# Altium PCB 175-00002 rev 3, PCB, Sinistro Clock Gen.PcbDoc (part 5 of 6)
Units mil, origin at the board's own origin, x right, y up, seen from the top; angles counter-clockwise.
Board outline 5905.51 x 4330.71 mil, 10 copper layers (Top Layer (.GTL), MidLayer1 (*.G1), +12V (*.GP1), -12V (*.GP2), A & GND (*.GP3), Chassis E (*.GP4), +28V & VCC (*.GP5), MidLayer2 (*.G2), MidLayer3 (*.G3), Bottom Layer (.GBL)), stack 64.6 mil thick; 502 components, 332 nets, 1948 pads, 915 vias.
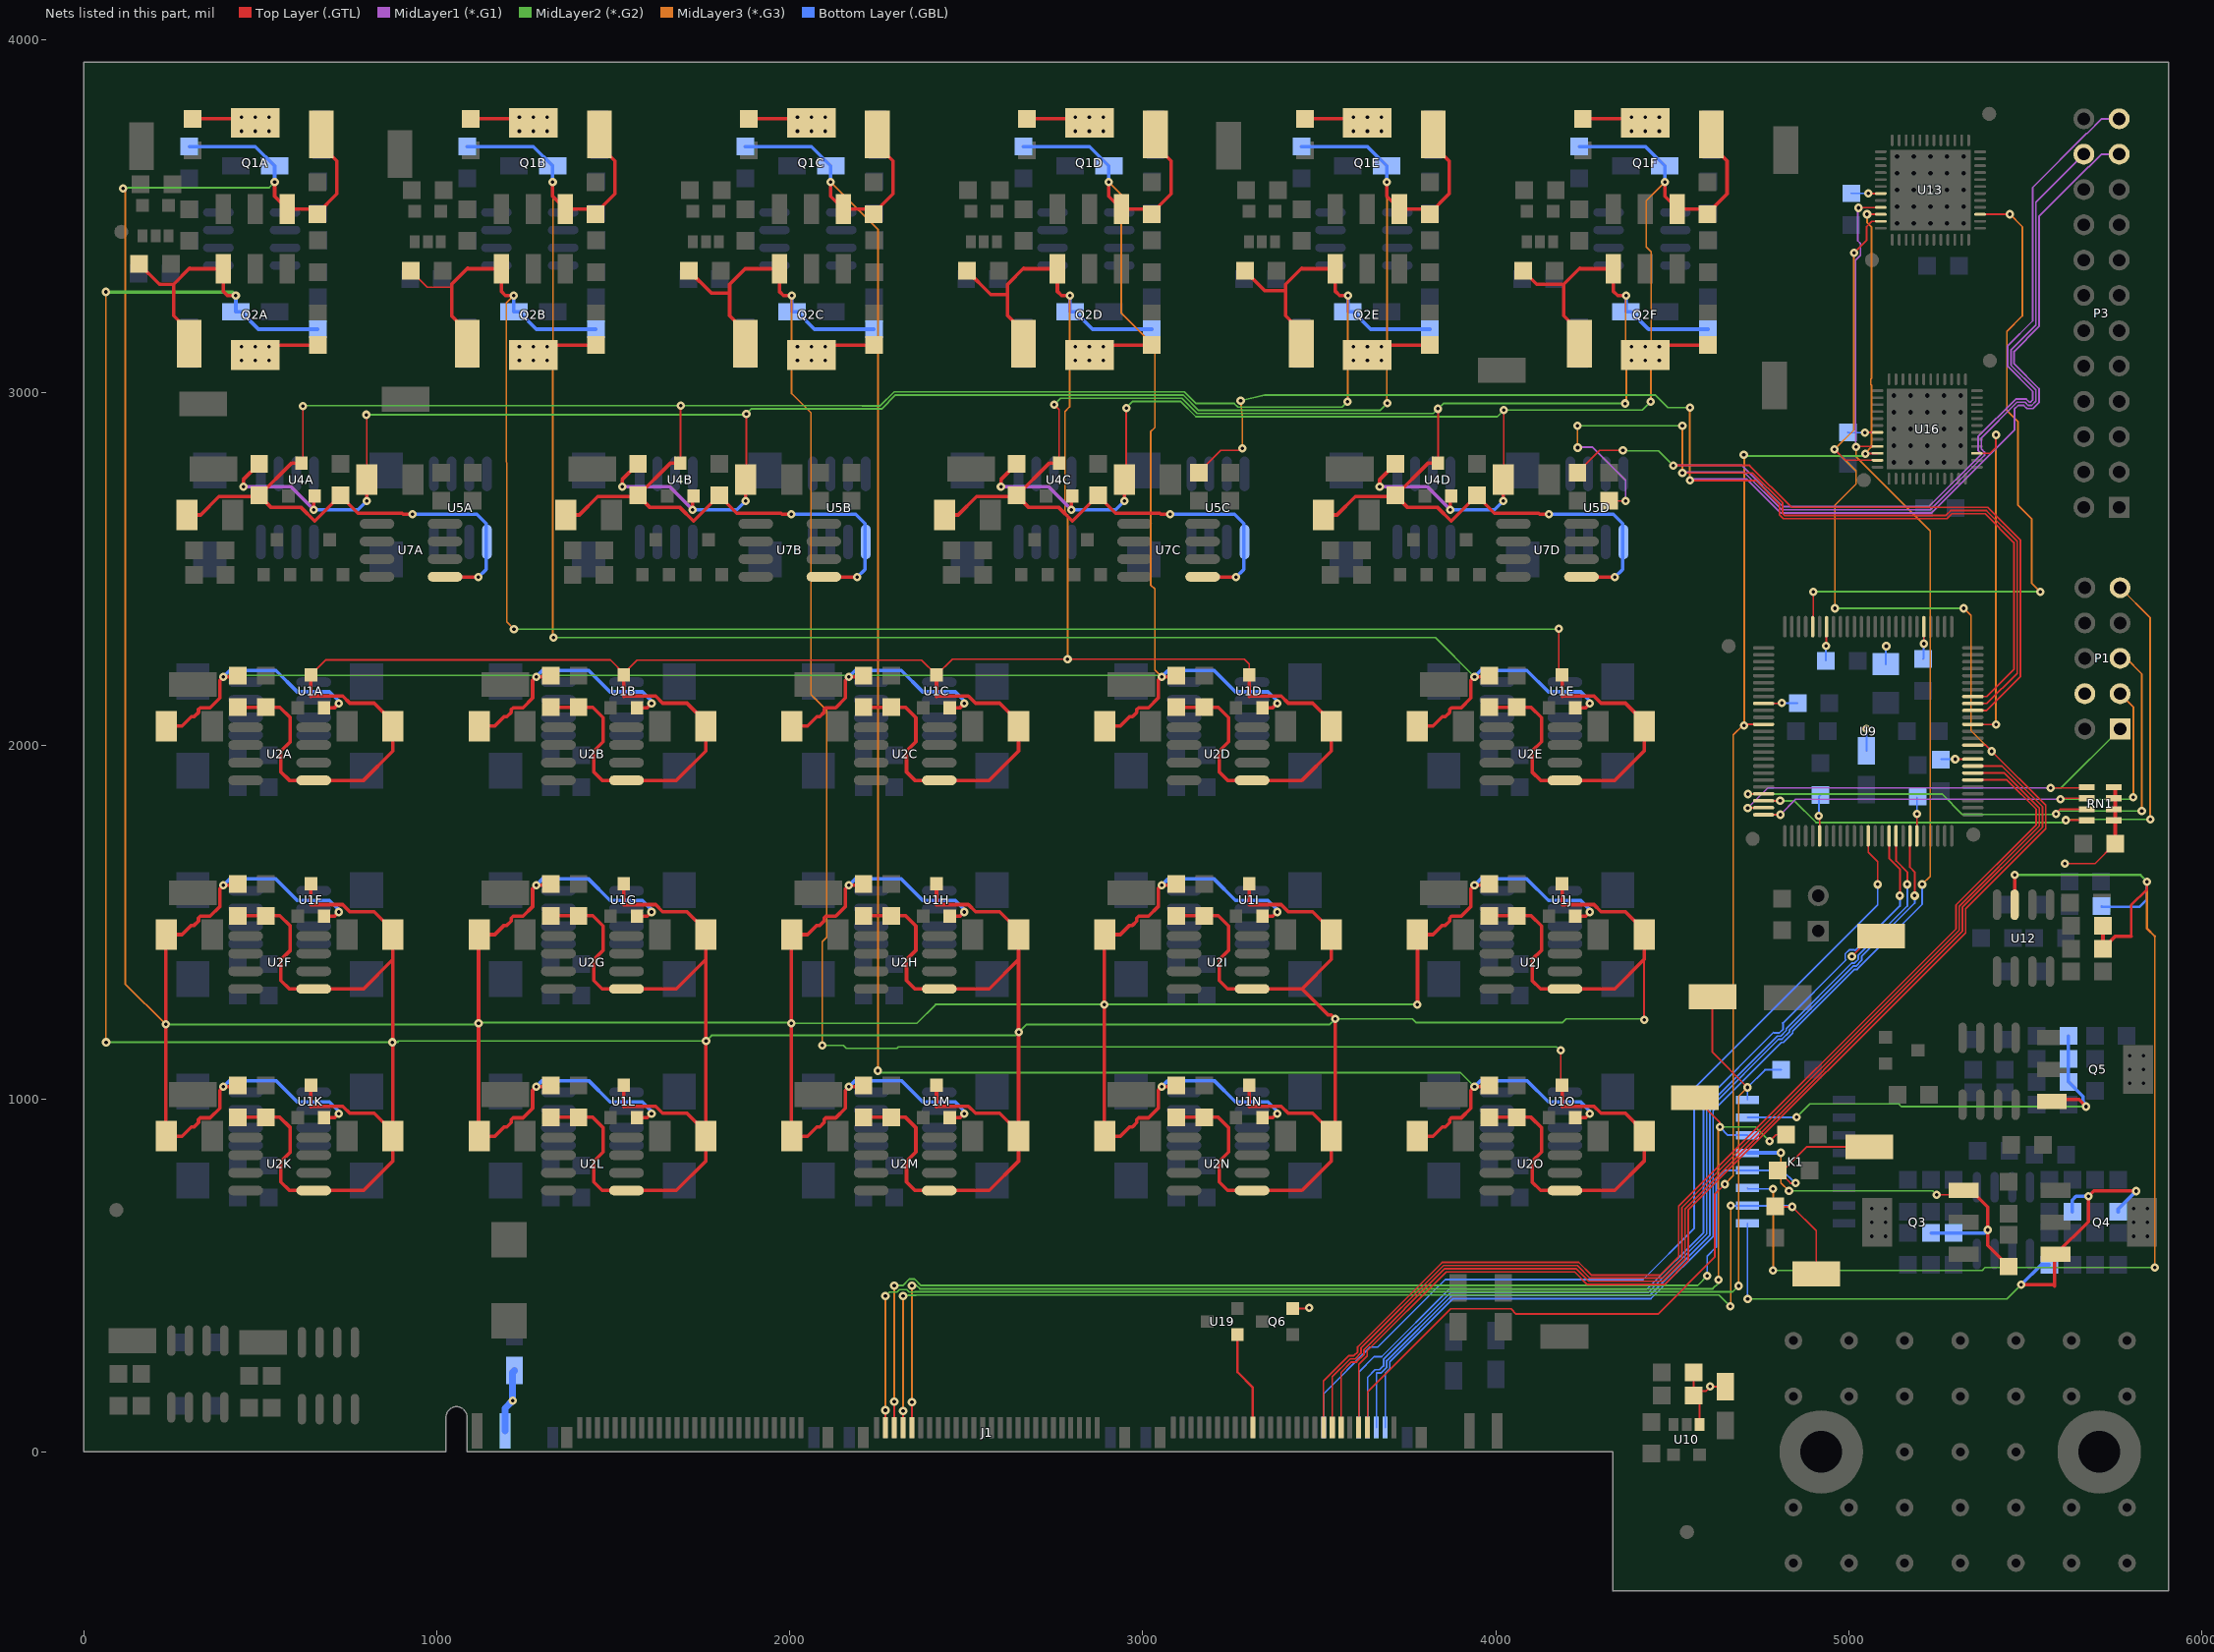
[diagram p13: the nets of this part, all layers, seen from the top]

## Via types
v1: diameter 24, hole 10, Top Layer (.GTL) to Bottom Layer (.GBL), 915 vias

## Nets (pads, with @x,y where several pads share a name; then routed paths per layer and width w, separated by ;. In a path a pad name is that pad's centre, name@x,y a point inside that pad or via, vN(x,y) a via of type N, cw(c..) or ccw(c..) an arc to the next point about the centre after c; other vN are vias at no path point) (continued)
PH_CLK21: P3.21 R3C.1 U9.68 | length 5397.5
  Top Layer (.GTL) w5: R3C.1@3158.07,2773.31 3220.76,2836 3276,2836 v1(3282,2842) ; v1(4549,2751) 4735.37,2751 4803,2683.37 4803,2653.54 4813.54,2643 5277.85,2643 5291.61,2656.76 5385.33,2656.76 5467,2575.1 5467,2216.06 5390,2139.06 U9.68@5350.67,2139.06
  MidLayer1 (*.G1) w5: v1(4549,2751) 4553.5,2755.5 4709.04,2755.5 4805.54,2659 5233.62,2659 5468.5,2893.88 5468.5,2952.66 5479.34,2963.5 5494.66,2963.5 5503.66,2954.5 5521.23,2954.5 5538,2971.27 5538,3010.84 5467.5,3081.34 5467.5,3116.5 5538,3187 5538,3498.95 5678.02,3638.97 5679.92,3638.97 5715.95,3675 P3.21@5765,3675
  MidLayer2 (*.G2) w5: v1(3277,2977) 3344.49,2992.49 4452,2992.49 4487,2957.49 v1(4549,2957.49)
  MidLayer3 (*.G3) w5: v1(3277,2977) 3282,2930 v1(3282,2842) ; v1(4549,2751) v1(4549,2957.49)
PH_CLK22: P3.22 R6D.1 U9.67 | length 4411.6
  Top Layer (.GTL) w5: R6D.1@4320.91,2693.31 4321.21,2693 v1(4367.5,2693) ; v1(4528,2772.5) 4726.6,2772.5 4812,2687.1 4812,2657.27 4817.27,2652 5274.12,2652 5287.88,2665.76 5389.06,2665.76 5476,2578.82 5476,2205 5390.37,2119.37 U9.67@5350.67,2119.37
  Top Layer (.GTL) w10: v1@4230.5,2845 v1@4230.91,2844.6 ; v1@4230.91,2843.24 v1(4231.67,2844)
  MidLayer1 (*.G1) w5: v1@4230.5,2845 4273.5,2845 4367.5,2751 v1(4367.5,2693) ; v1(4528,2772.5) 4529.91,2774.41 4702.86,2774.41 4809.27,2668 5229.89,2668 5383.5,2821.61 5383.5,2831.34 5374.5,2840.34 5374.5,2871.39 5475.61,2972.5 5498.39,2972.5 5507.39,2963.5 5517.23,2963.5 5528.73,2975 5529,2975 5529,3007.11 5458.5,3077.61 5458.5,3120.23 5529,3190.73 5529,3539 P3.22@5665,3675
  MidLayer2 (*.G2) w5: v1(4231,2906) v1(4528,2906)
  MidLayer3 (*.G3) w5: v1@4231,2836 v1(4231,2906) ; v1(4528,2772.5) v1(4528,2906)
PH_CLK23: P3.23 R3D.1 U9.66 | length 4175.1
  Top Layer (.GTL) w5: R3D.1@4230.91,2773.31 4293.6,2836 v1(4359.67,2836) ; v1(4502,2793.5) 4718.32,2793.5 4837.06,2674.76 5392.79,2674.76 5485,2582.55 5485,2195 5389.68,2099.69 U9.66@5350.67,2099.69
  MidLayer1 (*.G1) w5: v1(4502,2793.5) 4696.5,2793.5 4813,2677 5226.16,2677 5374.5,2825.34 5374.5,2827.61 5365.5,2836.61 5365.5,2875.12 5471.88,2981.5 5502.12,2981.5 5511.12,2972.5 5513.5,2972.5 5520,2979 5520,3003.38 5449.5,3073.88 5449.5,3132.5 5520,3203 5520,3580.95 5672.55,3733.5 5674.45,3733.5 5715.95,3775 P3.23@5765,3775
  MidLayer2 (*.G2) w5: v1@4357,2835 4460.5,2835 v1(4502,2793.5)
Q1_CA: Q1A.4 R12A.1 | length 165.6
  Top Layer (.GTL) w10: R12A.1@309.13,3775.32 Q1A.4@474.76,3775.32
Q1_CB: Q1B.4 R12B.1 | length 165.6
  Top Layer (.GTL) w10: R12B.1@1096.54,3775.32 Q1B.4@1262.17,3775.32
Q1_CC: Q1C.4 R12C.1 | length 165.6
  Top Layer (.GTL) w10: R12C.1@1883.94,3775.32 Q1C.4@2049.57,3775.32
Q1_CD: Q1D.4 R12D.1 | length 165.6
  Top Layer (.GTL) w10: R12D.1@2671.34,3775.32 Q1D.4@2836.97,3775.32
Q1_CE: Q1E.4 R12E.1 | length 165.6
  Top Layer (.GTL) w10: R12E.1@3458.74,3775.32 Q1E.4@3624.37,3775.32
Q1_CF: Q1F.4 R12F.1 | length 165.6
  Top Layer (.GTL) w10: R12F.1@4246.14,3775.32 Q1F.4@4411.77,3775.32
Q2_CA: Q2A.4 R20A.2 | length 149.3
  Top Layer (.GTL) w10: Q2A.4@514.13,3134.13 R20A.2@663.46,3134.13
Q2_CB: Q2B.4 R20B.2 | length 149.3
  Top Layer (.GTL) w10: Q2B.4@1301.53,3134.13 R20B.2@1450.87,3134.13
Q2_CC: Q2C.4 R20C.2 | length 149.3
  Top Layer (.GTL) w10: Q2C.4@2088.94,3134.13 R20C.2@2238.27,3134.13
Q2_CD: Q2D.4 R20D.2 | length 149.3
  Top Layer (.GTL) w10: Q2D.4@2876.34,3134.13 R20D.2@3025.67,3134.13
Q2_CE: Q2E.4 R20E.2 | length 149.3
  Top Layer (.GTL) w10: Q2E.4@3663.74,3134.13 R20E.2@3813.07,3134.13
Q2_CF: Q2F.4 R20F.2 | length 149.3
  Top Layer (.GTL) w10: Q2F.4@4451.14,3134.13 R20F.2@4600.47,3134.13
RESET_N: J1.6 U9.44 | length 2660.9
  Top Layer (.GTL) w5: U9.44@5170.41,1742.26 U9.44@5172.52,1744.37 5172.52,1655.48 5186,1642 v1(5186,1575)
  Bottom Layer (.GBL) w5: J1.6@3661.5,69.15 3661.5,223.34 3661.66,223.5 3674.39,223.5 3690.5,239.61 3690.5,258.23 3875.27,443 4435.27,443 4606,613.73 4606,974 4800.5,1168.5 4810.12,1168.5 4831.5,1189.88 4831.5,1195.23 5011.77,1375.5 5019.39,1375.5 5035.5,1391.61 5035.5,1403.5 5186,1554 v1(5186,1575)
RG: J1.17 U9.56 | length 3221.4
  Top Layer (.GTL) w5: J1.17@3511.5,69.15 3511.5,200.46 3583.54,272.5 3597.66,272.5 3608.5,283.34 3608.5,297.46 3847.91,536.87 4234.31,536.87 4270.18,501 4314,501 4465.8,501 4517.5,552.7 4517.5,695.68 5303,1481.18 5303,1549.18 5530,1776.18 5530,1819.82 5446.98,1902.84 U9.56@5350.67,1902.84
S1: J1.8 U9.42 | length 2667.1
  Top Layer (.GTL) w5: U9.42@5133.15,1744.37 5133.15,1673.85 5165,1642 v1(5165,1607)
  Bottom Layer (.GBL) w5: J1.8@3636.5,69.15 3636.5,211.07 3657.93,232.5 3670.66,232.5 3681.5,243.34 3681.5,261.96 3871.54,452 4431.54,452 4597,617.46 4597,977.73 4796.77,1177.5 4806.39,1177.5 4822.5,1193.61 4822.5,1198.96 5008.04,1384.5 5015.66,1384.5 5026.5,1395.34 5026.5,1407.23 5165,1545.73 v1(5165,1607)
S2: J1.10 U9.41 | length 2690.4
  Top Layer (.GTL) w5: U9.41@5113.46,1744.37 5113.46,1680.81 5144,1650.27 v1(5144,1575)
  Bottom Layer (.GBL) w5: J1.10@3611.5,69.15 3611.5,225.67 3655.34,269.5 3676.32,269.5 3867.82,461 4427.82,461 4588,621.18 4588,990 4785.92,1187.92 4787.34,1186.5 4802.66,1186.5 4813.5,1197.34 4813.5,1212.66 4812.08,1214.08 4991.42,1393.42 4989.5,1395.34 4989.5,1410.66 5000.34,1421.5 5015.66,1421.5 5017.58,1419.58 5144,1546 v1(5144,1575)
S3: J1.13 U9.58 | length 3246.8
  Top Layer (.GTL) w5: J1.13@3561.5,69.15 3561.5,225.01 3591,254.5 3605.12,254.5 3626.5,275.88 3626.5,290 3855.37,518.87 4226.86,518.87 4262.73,483 4314,483 4473.26,483 4535.5,545.24 4535.5,688.23 5321,1473.73 5321,1541.73 5548,1768.73 5548,1827.27 5433.07,1942.21 U9.58@5350.67,1942.21
S_WIRED_1: J1.33 U19.1 | length 280.9
  Top Layer (.GTL) w7: U19.1@3268,332 3268,226 3311.5,182.5 J1.33@3311.5,69.15
SCLK: J1.7 U9.12 U13.10 U16.10 | length 4734.8
  Top Layer (.GTL) w5: J1.7@3636.5,69.15 3636.5,170.07 3871.44,405 4042.56,405 4057.22,390.34 4458.61,390.34 4619.5,551.23 4619.5,729.5 v1(4648,758) ; v1(4703,2057) 4706.31,2060.32 U9.12@4758.15,2060.32 ; v1(5046,2827) 5079.89,2827 U16.10@5080.74,2827.85 ; v1(5051,3505) 5051.41,3504.59 U13.10@5089.74,3504.59
  MidLayer2 (*.G2) w5: v1(4702,2824) 4705.5,2820.5 5039.5,2820.5 v1(5046,2827)
  MidLayer3 (*.G3) w5: v1(4648,758) 4672,782 4672,801 4672,2030 4699,2057 v1(4703,2057) 4703,2823 v1(4702,2824) ; v1(5046,2827) 5046,2828 5063.5,2845.5 5063.5,3020.34 5061.5,3022.34 5061.5,3037.66 5063.5,3039.66 5063.5,3469.5 5051,3482 v1(5051,3505)
SEL_MAX1_N: U9.96 U13.27 | length 1968.4
  Top Layer (.GTL) w5: U9.96@4896.93,2336.89 4899,2338.96 v1(4899,2436) ; U13.27@5371.24,3504.59 5454.59,3504.59 v1(5455,3505)
  MidLayer2 (*.G2) w5: v1(4899,2436) v1(5542,2436)
  MidLayer3 (*.G3) w5: v1(5455,3505) 5490.96,3469.04 5490.96,3216.96 5447,3173 5447,2949 5478,2918 5478,2681.27 5517,2642.27 5517,2461 v1(5542,2436)
SEL_MAX2_N: U9.64 U16.27 | length 981.4
  Top Layer (.GTL) w5: U9.64@5350.67,2060.32 5350.98,2060 v1(5416,2060) ; U16.27@5362.24,2827.85 5399.01,2827.85 5416,2844.84 v1(5416,2880)
  MidLayer3 (*.G3) w5: v1(5416,2060) v1(5416,2880)
SG: J1.15 U9.57 | length 3234.1
  Top Layer (.GTL) w5: J1.15@3536.5,69.15 3536.5,212.73 3587.27,263.5 3601.39,263.5 3617.5,279.61 3617.5,293.73 3851.64,527.87 4230.59,527.87 4266.46,492 4314,492 4469.53,492 4526.5,548.97 4526.5,691.96 5312,1477.46 5312,1545.46 5539,1772.46 5539,1823.54 5440.02,1922.52 U9.57@5350.67,1922.52
SIMO: J1.9 U9.61 U13.11 U16.11 | length 5409.2
  Top Layer (.GTL) w5: J1.9@3611.5,69.15 3611.5,248.16 3635.5,272.15 3635.5,286.27 3859.09,509.87 4223.13,509.87 4259,474 4314,474 4476.99,474 4544.5,541.51 4544.5,684.5 5330,1470 5330,1538 5557,1765 5557,1831 v1(5404,1984) 5386.74,2001.26 U9.61@5350.67,2001.26 ; v1(4959,2839) 4989.83,2808.17 U16.11@5080.74,2808.17 ; v1(5014,3396) 5050,3432 5050,3470 5064.9,3484.91 U13.11@5089.74,3484.91
  MidLayer2 (*.G2) w5: v1(4960,2389) v1(5325,2389)
  MidLayer3 (*.G3) w5: v1(4960,2389) 4960,2681 5020,2741 5020,2778 v1(4959,2839) 5014,2894 v1(5014,3396) ; v1(5325,2389) 5345.5,2368.5 5345.5,2042.5 v1(5404,1984)
SOMI: J1.4 U13.9 U16.9 | length 4658.4
  Top Layer (.GTL) w5: v1@5020.54,2847.54 U16.9@5080.74,2847.54 ; v1(5027.16,3523) 5027.66,3523.5 5088.97,3523.5 U13.9@5089.74,3524.28
  MidLayer1 (*.G1) w5: v1@5018.5,2847.5 5018.5,3374.34 5032.5,3388.34 5032.5,3422 5024.73,3429.77 5024.73,3515.23 v1@5032.5,3523 ; v1(5027.16,3523) 5031.16,3527 5032,3527 v1@5032.5,3526.5
  MidLayer2 (*.G2) w5: v1@5026.16,3524 v1(5027.16,3523)
  MidLayer3 (*.G3) w5: v1(5020,2846) 5020,2818.48 5229.91,2608.57 5229.91,1629.91 v1(5207,1607)
  Bottom Layer (.GBL) w5: J1.4@3686.5,69.15 3686.5,222.89 3699.5,235.88 3699.5,254.5 3879,434 4439,434 4615,610 4615,966 4808.5,1159.5 4813.85,1159.5 4840.5,1186.15 4840.5,1191.5 5015.5,1366.5 5023.12,1366.5 5207,1550.38 v1(5207,1607)
TCK: P1.1 RN1.1 U9.24 | length 1292.4
  Top Layer (.GTL) w5: v1(4713,1823) 4714.09,1824.1 U9.24@4758.15,1824.1 ; v1(5571,1880) RN1.1@5670.23,1880
  MidLayer1 (*.G1) w5: v1(4713,1823) 4770,1880 v1(5571,1880)
  MidLayer2 (*.G2) w5: v1(5571,1880) 5600.47,1880 P1.1@5767.72,2047.24
TDI: P1.9 RN1.7 U9.23 | length 1874.1
  Top Layer (.GTL) w5: U9.23@4758.15,1843.78 v1(4804.78,1843.78) v1@4805,1844 ; v1(5614,1789) RN1.7@5672.16,1789
  MidLayer2 (*.G2) w5: v1(4804.78,1843.78) 4845.1,1843.78 4906.75,1782.13 5607.13,1782.13 v1(5614,1789) 5616,1791 v1(5853,1791)
  MidLayer3 (*.G3) w5: P1.9@5767.72,2447.24 5853,2361.96 v1(5853,1791)
TDO: P1.3 RN1.3 U9.25 | length 1451.9
  Top Layer (.GTL) w5: U9.25@4758.15,1804.41 v1(4805.59,1804.41) v1@4806,1804 ; v1(5599,1848) 5602.21,1851.21 RN1.3@5672.94,1851.21
  MidLayer1 (*.G1) w5: v1(4805.59,1804.41) 4849.18,1848 v1(5599,1848)
  MidLayer2 (*.G2) w5: v1(5599,1848) 5799,1848 v1(5805,1854)
  MidLayer3 (*.G3) w5: P1.3@5767.72,2147.24 5805,2109.96 v1(5805,1854)
TG: J1.18 U9.38 | length 2676.7
  Top Layer (.GTL) w5: U9.38@5054.41,1744.37 5054.41,1697.58 5081,1670.99 v1(5081,1607)
  Bottom Layer (.GBL) w5: J1.18@3511.5,69.15 3511.5,163.85 3644.15,296.5 3665.13,296.5 3856.63,488 4416.63,488 4561,632.37 4561,1028.73 5081,1548.73 v1(5081,1607)
TMS: P1.5 RN1.5 U9.22 | length 1749.3
  Top Layer (.GTL) w5: v1(4714,1863) 4714.46,1863.47 U9.22@4758.15,1863.47 ; v1@5585,1807 5597.72,1819.72 RN1.5@5672.94,1819.72
  MidLayer2 (*.G2) w5: v1(4714,1863) 5263,1863 5321,1805 5584,1805 v1(5586,1807) 5594,1815 v1(5829,1815)
  MidLayer3 (*.G3) w5: v1@5585,1807 v1(5586,1807) ; P1.5@5767.72,2247.24 5784.76,2247.24 5829,2203 v1(5829,1815)
VCC: C7.1 C12.2 C16.2 C17.2 C18.2 C19.2 C20.2 C21.2 C23.2 C24.2 C32.1 C34.2 C36.2 C55.1 J1.PC06 L5.2 P1.4 Q6.2 RN1.2 RN1.4 RN1.6 RN1.8 TP19.1 U9.9 U9.31 U9.45 U9.59 U9.80 U9.94 U10.1 U13.7 U16.7 | length 1823.3
  Top Layer (.GTL) w5: Q6.2@3424,406 3469,406 v1(3471,408) ; C12.2@4560,225 C16.2@4560,169 ; U10.1@4577,78 4577,143 C16.2@4560,160 C16.2@4560,169 ; C7.1@4650,185 v1(4607,185) 4594,172 4563,172 C16.2@4560,169 ; U9.9@4758.15,2119.37 4808.15,2119.37 v1(4809.41,2120.63) ; v1(4914.41,1800.63) 4916.61,1798.42 U9.31@4916.61,1744.37 ; v1(4935.41,2282.63) U9.94@4935.41,2336 ; v1(5008,1403) 5093,1488 TP19.1@5102,1488 ; v1(5045,2886.26) 5045.64,2886.91 U16.7@5080.74,2886.91 ; v1(5055,3564) 5055.35,3563.65 U13.7@5089.74,3563.65 ; U9.45@5192.2,1744.37 5192.2,1806.43 v1(5192.41,1806.63) ; v1(5211.41,2288.63) 5211.89,2289.11 U9.80@5211.89,2336.89 ; v1(5300.41,1961.63) 5300.67,1961.89 U9.59@5350.67,1961.89 ; v1(5611,1666) 5696.84,1666 5753.55,1722.71 C17.2@5754,1722.71
  Top Layer (.GTL) w10: RN1.2@5749.71,1882.71 5754,1878.42 C17.2@5754,1722.71
  Bottom Layer (.GBL) w5: v1(4809.41,2120.63) C19.2@4854.41,2120.63 ; v1(4914.41,1800.63) 4914.41,1855.63 C18.2@4919.41,1860.63 ; C23.2@4934.41,2240.63 4934.41,2281.63 v1(4935.41,2282.63) ; C36.2@4997,2887.26 4998,2886.26 v1(5045,2886.26) ; C34.2@5006,3564 v1(5055,3564) ; C32.1@5049.41,1985.63 v1(5049.41,2047.63) ; L5.2@5104.41,2230.63 5104.41,2280.63 v1(5105.41,2281.63) ; v1(5192.41,1806.63) C20.2@5192.41,1853.63 ; C21.2@5209.41,2245.63 5211.41,2247.63 v1(5211.41,2288.63) ; C24.2@5260.41,1961.63 v1(5300.41,1961.63)
  Bottom Layer (.GBL) w20: J1.PC06@1193.5,59.15 1193.5,123.5 v1(1215,145) 1215,225 C55.1@1220,230
VDD: J1.101 K1.16 R52.2 TP8.1 | length 3829
  Top Layer (.GTL) w5: v1(2271,118) 2271.16,117.84 J1.101@2271.16,68.09 ; TP8.1@4613,1289 4613,1131.38 v1(4712.19,1032.19)
  MidLayer2 (*.G2) w5: v1(2271,441) 2282.5,452.5 2303.66,452.5 2310.66,459.5 2331.34,459.5 2338.34,452.5 2353.66,452.5 2354.16,453 4670,453 v1(4687,470)
  MidLayer3 (*.G3) w5: v1(2271,118) v1(2271,441) ; v1(4687,470) 4687,1007 v1(4712.19,1032.19)
  Bottom Layer (.GBL) w5: K1.16@4712.19,997 v1(4712.19,1032.19) 4762.1,1082.1 R52.2@4808,1082.1
VDD_K1: C39.2 K1.15 Q5.3 R37.2 R43.2 | length 1337
  Top Layer (.GTL) w10: Q5.3@5546.46,997.84 5568.86,997.84 Q5.3@5574.41,992.28 5579.96,997.84 5651.46,997.84 v1(5671.46,977.84)
  MidLayer2 (*.G2) w5: v1(4851,948) 4888.5,985.5 5140.66,985.5 5148.33,977.84 v1(5671.46,977.84)
  Bottom Layer (.GBL) w5: K1.15@4712.19,947 4850,947 v1(4851,948)
  Bottom Layer (.GBL) w10: R43.2@5621.46,1177.84 R37.2@5621.46,1047.84 5662.46,1006.84 5662.46,991.84 5671.46,982.84 v1(5671.46,977.84)
VOD: J1.95 K1.14 R49.2 TP5.1 | length 3553.1
  Top Layer (.GTL) w5: v1(2346,141) 2346.16,140.84 J1.95@2346.16,68.09 ; TP5.1@4564,1003 4634,933 v1(4634,920) ; v1(4775,880) 4793,898 R49.2@4822,898
  MidLayer2 (*.G2) w5: v1(2346,471) 2359.43,471 2368.43,462 4614,462 4630,478 v1(4630,487) ; v1(4634,920) 4735,920 v1(4775,880)
  MidLayer3 (*.G3) w5: v1(2346,141) v1(2346,471) ; v1(4630,487) 4630,745.34 4629.5,745.84 4629.5,915.5 v1(4634,920)
  Bottom Layer (.GBL) w5: v1(4634,920) 4657,897 K1.14@4712.19,897
VOD_K1: C29.2 K1.13 Q3.3 R15.2 R31.2 | length 1164.5
  Top Layer (.GTL) w5: v1(5248,728) 5311.79,728 Q3.3@5324.26,740.47
  Top Layer (.GTL) w10: Q3.3@5322.21,742.52 Q3.3@5324.26,740.47 5345.79,740.47 5392.72,693.54 v1(5392.72,628.54) 5392.72,584.42 R31.2@5452.22,524.92
  MidLayer2 (*.G2) w5: v1(4830,739) 5237,739 v1(5248,728)
  MidLayer3 (*.G3) w5: v1(4807,847) 4807,762 v1(4830,739)
  Bottom Layer (.GBL) w10: K1.13@4712.19,847 v1(4807,847) ; C29.2@5232.22,619.92 R15.2@5296.19,619.92 5384.09,619.92 v1(5392.72,628.54)
VOG: J1.99 K1.12 R51.2 TP7.1 | length 3620.8
  Top Layer (.GTL) w5: v1(2296,142) 2296.16,141.84 J1.99@2296.16,68.09 ; v1(4849,761) 4834,761 R51.2@4798,797 4814,797 4881,864 TP7.1@5058,864
  MidLayer2 (*.G2) w5: v1(2296,471) 2319.84,471 2338.34,489.5 2353.66,489.5 2372.16,471 4571,471 v1(4598,498)
  MidLayer3 (*.G3) w5: v1(2296,142) v1(2296,471)
  Bottom Layer (.GBL) w5: v1(4598,498) 4598,554.27 4624,580.27 4624,773 4648,797 K1.12@4712.19,797 4811,797 4847,761 v1(4849,761)
VOG_K1: C30.2 K1.11 R21.2 R36.2 U12.7 | length 3481.1
  Top Layer (.GTL) w5: 5799,1460 5800,1461
  Top Layer (.GTL) w7: 5799,1460 5799,1548 5844,1593 v1(5844,1615)
  Top Layer (.GTL) w10: U12.7@5469,1549.49 v1(5469,1634) ; C30.2@5719,1490 R21.2@5719,1425 5754,1460 5799,1460
  MidLayer2 (*.G2) w5: v1(4785,514) 5097,514 5377.01,514 5385.05,522.04 v1@5866,522.04
  MidLayer2 (*.G2) w7: v1(5469,1634) 5825,1634 v1(5844,1615)
  MidLayer3 (*.G3) w5: v1(4785,514) v1(4785,745) ; v1(5866,522) 5866,1460
  MidLayer3 (*.G3) w7: v1(5844,1615) 5844,1482 5866,1460
  Bottom Layer (.GBL) w5: K1.11@4712.19,747 4714.19,745 v1(4785,745)
  Bottom Layer (.GBL) w7: R36.2@5715,1545 5716,1544 5823,1544 5844,1565 v1(5844,1615)
VRD: J1.97 K1.10 R50.2 TP6.1 | length 3458.7
  Top Layer (.GTL) w5: v1(2321,116) 2321.16,115.84 J1.97@2321.16,68.09 ; R50.2@4791,696 4793,694 v1(4839,694) 4907,626 TP6.1@4907,504
  MidLayer2 (*.G2) w5: v1(2321,441) 2323.5,443.5 2357.39,443.5 2357.89,444 4632,444 v1(4664,412)
  MidLayer3 (*.G3) w5: v1(2321,116) v1(2321,441) ; v1(4664,412) 4665,412 v1(4665,697)
  Bottom Layer (.GBL) w5: v1(4665,697) K1.10@4712.19,697 4836,697 v1(4839,694)
VRD_K1: C28.2 K1.9 Q4.3 R18.2 R34.1 | length 1802.4
  Top Layer (.GTL) w10: v1(5487.72,473.54) 5578.59,473.54 5582.21,469.92 5582.21,556.42 Q4.3@5585.17,559.37 5677.72,651.92 v1(5677.72,723.54) 5693.72,739.54 5811.72,739.54 v1(5812.72,738.54)
  MidLayer2 (*.G2) w5: v1(4713,433) 5447.17,433 v1(5487.72,473.54)
  Bottom Layer (.GBL) w5: K1.9@4712.19,647 4712.19,433.81 v1(4713,433)
  Bottom Layer (.GBL) w10: v1(5487.72,473.54) 5544.09,529.92 R34.1@5567.22,529.92 ; R18.2@5632.21,679.92 5632.21,713.04 5642.72,723.54 v1(5677.72,723.54) ; C28.2@5762.21,679.92 5762.21,688.04 v1(5812.72,738.54)
VREFHI1: C4F.2 C4G.2 C4H.2 C4I.2 C4J.2 C4K.2 C4L.2 C4M.2 C4N.2 C13A.1 L1F.1 L1G.1 L1H.1 L1I.1 L1J.1 L1K.1 L1L.1 L1M.1 L1N.1 Q1A.3 R7A.2 R13A.2 TP1A.1 U1F.2 U1G.2 U1H.2 U1I.2 U1J.2 U1K.2 U1L.2 U1M.2 U1N.2 | length 16155.3
  Top Layer (.GTL) w10: L1F.1@232.87,1463.18 v1(232.87,1210.49) 232.87,895.63 L1K.1@234.53,893.98 278.8,893.98 305.12,920.3 313.19,920.3 325.53,932.63 325.53,940.7 330.8,945.98 358.49,945.98 385.87,973.36 385.87,1023.66 v1(396.04,1033.82) ; L1F.1@232.87,1466.5 234.53,1464.84 278.8,1464.84 305.12,1491.16 313.19,1491.16 325.53,1503.5 325.53,1511.57 330.8,1516.84 358.49,1516.84 385.87,1544.22 385.87,1594.52 v1@395.98,1604.64 ; v1(396.04,1033.82) v1(396.04,1033.82) ; v1(396.04,1604.69) v1@395.98,1604.64 ; C4K.2@437.32,1037.4 433.69,1033.77 v1(396.04,1033.82) ; C4F.2@437.32,1608.27 433.69,1604.64 v1@395.98,1604.64 ; v1(541.3,3595.59) 541.3,3555.24 Q1A.3@576.85,3519.68 651.93,3519.69 663.46,3508.15 717.6,3562.28 717.6,3655.51 673.31,3699.8 TP1A.1@673.31,3730.32 ; U1K.2@681.42,946.14 710.94,946.14 v1(722.76,957.95) ; U1F.2@681.42,1517.01 710.94,1517.01 v1(722.76,1528.82) ; L1G.1@1118.7,1463.18 v1(1118.7,1214) 1118.7,895.63 L1L.1@1120.35,893.98 1164.63,893.98 1190.95,920.3 1199.02,920.3 1211.35,932.63 1211.35,940.7 1216.63,945.98 1244.31,945.98 1271.7,973.36 1271.7,1023.66 v1(1281.86,1033.82) ; L1G.1@1118.7,1466.5 1120.35,1464.84 1164.63,1464.84 1190.95,1491.16 1199.02,1491.16 1211.35,1503.5 1211.35,1511.57 1216.63,1516.84 1244.31,1516.84 1271.7,1544.22 1271.7,1594.52 v1@1281.81,1604.64 ; v1(1281.86,1033.82) v1(1281.86,1033.82) ; v1(1281.86,1604.69) v1@1281.81,1604.64 ; C4L.2@1323.15,1037.4 1319.52,1033.77 v1(1281.86,1033.82) ; C4G.2@1323.15,1608.27 1319.52,1604.64 v1@1281.81,1604.64 ; U1L.2@1567.24,946.14 1596.77,946.14 v1(1608.58,957.95) ; U1G.2@1567.24,1517.01 1596.77,1517.01 v1(1608.58,1528.82) ; L1H.1@2004.52,1463.18 v1(2004.52,1214) 2004.52,895.63 L1M.1@2006.18,893.98 2050.45,893.98 2076.78,920.3 2084.85,920.3 2097.18,932.63 2097.18,940.7 2102.45,945.98 2130.14,945.98 2157.52,973.36 2157.52,1023.66 v1@2167.64,1033.77 ; L1H.1@2004.52,1466.5 2006.18,1464.84 2050.45,1464.84 2076.78,1491.16 2084.85,1491.16 2097.18,1503.5 2097.18,1511.57 2102.45,1516.84 2130.14,1516.84 2157.52,1544.22 2157.52,1594.52 v1@2167.64,1604.64 ; v1(2167.69,1033.82) v1@2167.64,1033.77 ; v1(2167.69,1604.69) v1@2167.64,1604.64 ; C4M.2@2208.98,1037.4 2205.35,1033.77 v1@2167.64,1033.77 ; C4H.2@2208.98,1608.27 2205.35,1604.64 v1@2167.64,1604.64 ; U1M.2@2453.07,946.14 2482.6,946.14 v1(2494.41,957.95) ; U1H.2@2453.07,1517.01 2482.6,1517.01 v1(2494.41,1528.82) ; v1(3053.52,1033.82) v1@3053.46,1033.77 ; v1(3053.52,1604.69) v1@3053.46,1604.64 ; C4N.2@3094.8,1037.4 3091.17,1033.77 v1@3053.46,1033.77 ; C4I.2@3094.8,1608.27 3091.17,1604.64 v1@3053.46,1604.64 ; U1N.2@3338.9,946.14 3368.42,946.14 v1(3380.24,957.95) ; U1I.2@3338.9,1517.01 3368.42,1517.01 v1(3380.24,1528.82) ; L1J.1@3776.18,1466.5 L1J.1@3777.83,1464.84 ; v1(3777,1267) 3777.83,1267.84 L1J.1@3777.83,1464.84 ; v1(3939.34,1604.69) v1@3939.29,1604.64 ; C4J.2@3980.63,1608.27 3977,1604.64 v1@3939.29,1604.64 ; U1J.2@4224.72,1517.01 4254.25,1517.01 v1(4266.06,1528.82) ; v1@3053.46,1033.77 3043.35,1023.66 3043.35,973.36 3015.97,945.98 2988.28,945.98 2983.01,940.7 2983.01,932.63 2970.67,920.3 2962.6,920.3 2936.28,893.98 L1N.1@2892.01,893.98 2890.35,895.63 2890.35,1464.84 2890.35,1466.5 2892.01,1464.84 2936.28,1464.84 2962.6,1491.16 2970.67,1491.16 2983.01,1503.5 2983.01,1511.57 2988.28,1516.84 3015.97,1516.84 3043.35,1544.22 3043.35,1594.52 v1@3053.46,1604.64 ; L1J.1@3777.83,1464.84 3822.11,1464.84 3848.43,1491.16 3856.5,1491.16 3868.83,1503.5 3868.83,1511.57 3874.11,1516.84 3901.79,1516.84 3929.18,1544.22 3929.18,1594.52 v1@3939.29,1604.64
  MidLayer1 (*.G1) w10: v1(396.04,1033.82) v1@396.49,1033.36 ; v1(396.04,1604.69) v1@396.49,1604.23 ; v1(1281.86,1033.82) v1@1282.32,1033.36 ; v1(1281.86,1604.69) v1@1282.32,1604.23 ; v1(2167.69,1033.82) v1@2168.15,1033.36 ; v1(2167.69,1604.69) v1@2168.15,1604.23 ; v1(3053.52,1033.82) v1@3053.97,1033.36 ; v1(3053.52,1604.69) v1@3053.97,1604.23 ; v1(3939.34,1604.69) v1@3939.8,1604.23
  MidLayer2 (*.G2) w5: v1(112,3578) 113.93,3579.93 525.63,3579.93 v1(541.3,3595.59) ; v1(232.87,1210.49) 1115.19,1210.49 v1(1118.7,1214) 1118.7,1216 2002.52,1216 v1(2004.52,1214) 2360,1214 2413,1267 v1(2890.35,1267) v1(3777,1267)
  MidLayer3 (*.G3) w5: v1(112,3578) 118,3572 118,1325.36 v1(232.87,1210.49)
  Bottom Layer (.GBL) w10: R7A.2@299.29,3696.58 486.46,3696.58 C13A.1@541.3,3641.73 v1(541.3,3595.59) ; v1(396.04,1033.82) 413.7,1051.49 544.58,1051.49 605.09,990.97 696.76,990.97 722.76,964.97 v1(722.76,957.95) ; v1(396.04,1604.69) 413.7,1622.35 544.58,1622.35 605.09,1561.83 696.76,1561.83 722.76,1535.83 v1(722.76,1528.82) ; v1(1281.86,1033.82) 1299.53,1051.49 1430.4,1051.49 1490.92,990.97 1582.58,990.97 1608.58,964.97 v1(1608.58,957.95) ; v1(1281.86,1604.69) 1299.53,1622.35 1430.4,1622.35 1490.92,1561.83 1582.58,1561.83 1608.58,1535.83 v1(1608.58,1528.82) ; v1(2167.69,1033.82) 2185.35,1051.49 2316.23,1051.49 2376.75,990.97 2468.41,990.97 2494.41,964.97 v1(2494.41,957.95) ; v1(2167.69,1604.69) 2185.35,1622.35 2316.23,1622.35 2376.75,1561.83 2468.41,1561.83 2494.41,1535.83 v1(2494.41,1528.82) ; v1(3053.52,1033.82) 3071.18,1051.49 3202.06,1051.49 3262.57,990.97 3354.24,990.97 3380.24,964.97 v1(3380.24,957.95) ; v1(3053.52,1604.69) 3071.18,1622.35 3202.06,1622.35 3262.57,1561.83 3354.24,1561.83 3380.24,1535.83 v1(3380.24,1528.82) ; v1(3939.34,1604.69) 3957.01,1622.35 4087.88,1622.35 4148.4,1561.83 4240.06,1561.83 4266.06,1535.83 v1(4266.06,1528.82)
VREFHI2: C4E.2 C13B.1 L1E.1 Q1B.3 R7B.2 R13B.2 TP1B.1 U1E.2 | length 5423.6
  Top Layer (.GTL) w10: v1(1328.7,3595.59) 1328.7,3555.24 Q1B.3@1364.25,3519.68 1439.33,3519.69 1450.87,3508.15 1505,3562.28 1505,3655.51 1460.71,3699.8 TP1B.1@1460.71,3730.32 ; L1E.1@3776.18,2057.05 L1E.1@3777.83,2055.39 3822.11,2055.39 3848.43,2081.72 3856.5,2081.72 3868.83,2094.05 3868.83,2102.12 3874.11,2107.39 3901.79,2107.39 3929.18,2134.78 3929.18,2185.07 v1(3939.34,2195.24) ; v1(3939.34,2195.24) v1(3939.34,2195.24) ; C4E.2@3980.63,2198.82 3977,2195.19 v1(3939.34,2195.24) ; U1E.2@4224.72,2107.56 4254.25,2107.56 v1(4266.06,2119.37)
  MidLayer1 (*.G1) w10: v1(3939.34,2195.24) v1@3939.8,2194.78
  MidLayer2 (*.G2) w5: v1(1331,2306) 3828.58,2306 v1(3939.34,2195.24)
  MidLayer3 (*.G3) w5: v1(1328.7,3595.59) 1329.57,3594.72 1329.57,3083.72 1329,3083.15 1329,2308 v1(1331,2306)
  Bottom Layer (.GBL) w10: R7B.2@1086.69,3696.58 1273.86,3696.58 C13B.1@1328.7,3641.73 v1(1328.7,3595.59) ; v1(3939.34,2195.24) 3957.01,2212.9 4087.88,2212.9 4148.4,2152.39 4240.06,2152.39 4266.06,2126.39 v1(4266.06,2119.37)
VREFHI3: C4O.2 C13C.1 L1O.1 Q1C.3 R7C.2 R13C.2 TP1C.1 U1O.2 | length 5760.4
  Top Layer (.GTL) w10: v1(2116.1,3595.59) 2116.1,3555.24 Q1C.3@2151.65,3519.68 2226.73,3519.69 2238.27,3508.15 2292.4,3562.28 2292.4,3655.51 2248.11,3699.8 TP1C.1@2248.11,3730.32 ; L1O.1@3776.18,895.63 L1O.1@3777.83,893.98 3822.11,893.98 3848.43,920.3 3856.5,920.3 3868.83,932.63 3868.83,940.7 3874.11,945.98 3901.79,945.98 3929.18,973.36 3929.18,1023.66 v1(3939.34,1033.82) ; v1(3939.34,1033.82) v1(3939.34,1033.82) ; C4O.2@3980.63,1037.4 3977,1033.77 v1(3939.34,1033.82) ; U1O.2@4224.72,946.14 4254.25,946.14 v1(4266.06,957.95)
  MidLayer1 (*.G1) w10: v1(3939.34,1033.82) v1@3939.8,1033.36
  MidLayer2 (*.G2) w5: v1(2249.73,1079.49) 2249.73,1080.73 2250,1081 2257,1074 3899.17,1074 v1(3939.34,1033.82)
  MidLayer3 (*.G3) w5: v1(2116.1,3595.59) 2249.73,3461.96 v1(2249.73,1079.49)
  Bottom Layer (.GBL) w10: R7C.2@1874.09,3696.58 2061.26,3696.58 C13C.1@2116.1,3641.73 v1(2116.1,3595.59) ; v1(3939.34,1033.82) 3957.01,1051.49 4087.88,1051.49 4148.4,990.97 4240.06,990.97 4266.06,964.97 v1(4266.06,957.95)
VREFHI4: C4A.2 C4B.2 C4C.2 C4D.2 C13D.1 L1A.1 L1B.1 L1C.1 L1D.1 Q1D.3 R7D.2 R13D.2 TP1D.1 U1A.2 U1B.2 U1C.2 U1D.2 | length 7767.9
  Top Layer (.GTL) w10: L1A.1@232.87,2057.05 L1A.1@234.53,2055.39 278.8,2055.39 305.12,2081.72 313.19,2081.72 325.53,2094.05 325.53,2102.12 330.8,2107.39 358.49,2107.39 385.87,2134.78 385.87,2185.07 v1(396.04,2195.24) ; v1(396.04,2195.24) v1(396.04,2195.24) ; C4A.2@437.32,2198.82 433.69,2195.19 v1(396.04,2195.24) ; U1A.2@681.42,2107.56 710.94,2107.56 v1(722.76,2119.37) ; L1B.1@1118.7,2057.05 L1B.1@1120.35,2055.39 1164.63,2055.39 1190.95,2081.72 1199.02,2081.72 1211.35,2094.05 1211.35,2102.12 1216.63,2107.39 1244.31,2107.39 1271.7,2134.78 1271.7,2185.07 v1(1281.86,2195.24) ; v1(1281.86,2195.24) v1(1281.86,2195.24) ; C4B.2@1323.15,2198.82 1319.52,2195.19 v1(1281.86,2195.24) ; U1B.2@1567.24,2107.56 1596.77,2107.56 v1(1608.58,2119.37) ; L1C.1@2004.52,2057.05 L1C.1@2006.18,2055.39 2050.45,2055.39 2076.78,2081.72 2084.85,2081.72 2097.18,2094.05 2097.18,2102.12 2102.45,2107.39 2130.14,2107.39 2157.52,2134.78 2157.52,2185.07 v1@2167.64,2195.19 ; v1(2167.69,2195.24) v1@2167.64,2195.19 ; C4C.2@2208.98,2198.82 2205.35,2195.19 v1@2167.64,2195.19 ; U1C.2@2453.07,2107.56 2482.6,2107.56 v1(2494.41,2119.37) ; L1D.1@2890.35,2057.05 L1D.1@2892.01,2055.39 2936.28,2055.39 2962.6,2081.72 2970.67,2081.72 2983.01,2094.05 2983.01,2102.12 2988.28,2107.39 3015.97,2107.39 3043.35,2134.78 3043.35,2185.07 v1@3053.46,2195.19 ; v1(2903.5,3595.59) 2903.5,3555.24 Q1D.3@2939.06,3519.68 3014.13,3519.69 3025.67,3508.15 3079.8,3562.28 3079.8,3655.51 3035.51,3699.8 TP1D.1@3035.51,3730.32 ; v1(3053.52,2195.24) v1@3053.46,2195.19 ; C4D.2@3094.8,2198.82 3091.17,2195.19 v1@3053.46,2195.19 ; U1D.2@3338.9,2107.56 3368.42,2107.56 v1(3380.24,2119.37)
  MidLayer1 (*.G1) w10: v1(396.04,2195.24) v1@396.49,2194.78 ; v1(1281.86,2195.24) v1@1282.32,2194.78 ; v1(2167.69,2195.24) v1@2168.15,2194.78 ; v1(3053.52,2195.24) v1@3053.97,2194.78
  MidLayer2 (*.G2) w5: v1@400.61,2198.89 v1@3049.86,2198.89
  MidLayer3 (*.G3) w5: v1(2903.5,3595.59) 2939,3560.09 2939,3224.88 3034,3129.88 3034,2901.07 3022,2889.07 3022,2455.46 3034,2443.46 3034,2214.65 3034.1,2214.65 v1(3053.52,2195.24)
  Bottom Layer (.GBL) w10: v1(396.04,2195.24) 413.7,2212.9 544.58,2212.9 605.09,2152.39 696.76,2152.39 722.76,2126.39 v1(722.76,2119.37) ; v1(1281.86,2195.24) 1299.53,2212.9 1430.4,2212.9 1490.92,2152.39 1582.58,2152.39 1608.58,2126.39 v1(1608.58,2119.37) ; v1(2167.69,2195.24) 2185.35,2212.9 2316.23,2212.9 2376.75,2152.39 2468.41,2152.39 2494.41,2126.39 v1(2494.41,2119.37) ; R7D.2@2661.5,3696.58 2848.66,3696.58 C13D.1@2903.5,3641.73 v1(2903.5,3595.59) ; v1(3053.52,2195.24) 3071.18,2212.9 3202.06,2212.9 3262.57,2152.39 3354.24,2152.39 3380.24,2126.39 v1(3380.24,2119.37)
VREFHI5: C6A.2 C6B.2 C13E.1 L3A.1 L3B.1 Q1E.3 R7E.2 R13E.2 TP1E.1 U4A.2 U4B.2 | length 5835.3
  Top Layer (.GTL) w5: v1(801,2937) 802.4,2935.6 L3A.1@802.4,2753.31 ; L3B.1@1877,2755.07 v1(1877,2939)
  Top Layer (.GTL) w10: v1(452.4,2733.31) 452.4,2753.31 C6A.2@497.4,2798.31 ; v1(652.4,2668.31) 652.4,2704.64 U4A.2@654.8,2707.05 ; v1(802.4,2693.31) L3A.1@802.4,2753.31 ; v1(1525.24,2733.31) 1525.24,2753.31 C6B.2@1570.24,2798.31 ; v1(1725.24,2668.31) 1725.24,2704.64 U4B.2@1727.64,2707.05 ; v1(1875.24,2693.31) L3B.1@1875.24,2753.31 ; v1(3690.9,3595.59) 3690.9,3555.24 Q1E.3@3726.46,3519.68 3801.53,3519.69 3813.07,3508.15 3867.2,3562.28 3867.2,3655.51 3822.91,3699.8 TP1E.1@3822.91,3730.32
  MidLayer1 (*.G1) w10: v1(452.4,2733.31) 587.4,2733.31 v1(652.4,2668.31) ; v1(1525.24,2733.31) 1660.24,2733.31 v1(1725.24,2668.31)
  MidLayer2 (*.G2) w5: v1(801,2937) 1874,2937 v1@1877,2940 ; v1(1877,2939) v1@1877,2940 ; v1(3692,2970) 3671.5,2949.5 3157.77,2949.5 3114.27,2993 2299.73,2993 2260.23,2953.5 1890.5,2953.5 v1@1877,2940
  MidLayer3 (*.G3) w5: v1(3690.9,3595.59) 3691.77,3594.72 3691.77,3083.72 3691,3082.94 3691,2970 v1(3692,2970) v1@3692,2969
  Bottom Layer (.GBL) w10: v1(652.4,2668.31) 777.4,2668.31 v1(802.4,2693.31) ; v1(1725.24,2668.31) 1850.24,2668.31 v1(1875.24,2693.31) ; R7E.2@3448.9,3696.58 3636.06,3696.58 C13E.1@3690.91,3641.73 v1(3690.9,3595.59)
VREFHI6: C6C.2 C6D.2 C13F.1 L3C.1 L3D.1 Q1F.3 R7F.2 R13F.2 TP1F.1 U4C.2 U4D.2 | length 4474.3
  Top Layer (.GTL) w5: L3C.1@2953,2758.24 v1(2953,2956) ; L3D.1@4022,2754.4 v1(4022,2950)
  Top Layer (.GTL) w10: v1(2598.07,2733.31) 2598.07,2753.31 C6C.2@2643.07,2798.31 ; v1(2798.07,2668.31) 2798.07,2704.64 U4C.2@2800.47,2707.05 ; v1(2948.07,2693.31) L3C.1@2948.07,2753.31 ; v1(3670.91,2733.31) 3670.91,2753.31 C6D.2@3715.91,2798.31 ; v1(3870.91,2668.31) 3870.91,2704.64 U4D.2@3873.31,2707.05 ; v1(4020.91,2693.31) L3D.1@4020.91,2753.31 ; v1(4478.31,3595.59) 4478.31,3555.24 Q1F.3@4513.86,3519.68 4588.94,3519.69 4600.47,3508.15 4654.61,3562.28 4654.61,3655.51 4610.31,3699.8 TP1F.1@4610.31,3730.32
  MidLayer1 (*.G1) w10: v1(2598.07,2733.31) 2733.07,2733.31 v1(2798.07,2668.31) ; v1(3670.91,2733.31) 3805.91,2733.31 v1(3870.91,2668.31)
  MidLayer2 (*.G2) w5: v1@2955,2954 v1(2953,2956) 2953,2957 2971,2975 3106.82,2975 3150.32,2931.5 4003.5,2931.5 v1(4022,2950) 4022.5,2950.5 4414.74,2950.5 v1(4437.73,2973.49)
  MidLayer3 (*.G3) w5: v1@4438,2975 4437.73,2974.73 v1(4437.73,2973.49) 4439,2974.76 4439,3082.91 4439.81,3083.72 4439.81,3398.28 4425.48,3412.61 4425.48,3542.76 v1(4478.31,3595.59)
  Bottom Layer (.GBL) w10: v1(2798.07,2668.31) 2923.07,2668.31 v1(2948.07,2693.31) ; v1(3870.91,2668.31) 3995.91,2668.31 v1(4020.91,2693.31) ; R7F.2@4236.3,3696.58 4423.46,3696.58 C13F.1@4478.31,3641.73 v1(4478.31,3595.59)
VREFLO1: C2F.1 C2G.1 C2H.1 C2I.1 C2J.1 C2K.1 C2L.1 C2M.1 C2N.1 C4F.1 C4G.1 C4H.1 C4I.1 C4J.1 C4K.1 C4L.1 C4M.1 C4N.1 C14A.2 L2F.1 L2G.1 L2H.1 L2I.1 L2J.1 L2K.1 L2L.1 L2M.1 L2N.1 Q2A.3 R9A.1 R17A.2 TP2A.1 U1F.3 U1G.3 U1H.3 U1I.3 U1J.3 U1K.3 U1L.3 U1M.3 U1N.3 U2F.5 U2G.5 U2H.5 U2I.5 U2J.5 U2K.5 U2L.5 U2M.5 U2N.5 | length 20007
  Top Layer (.GTL) w5: v1(4419.65,1223.35) 4419.65,1394.2 L2J.1@4419.65,1464.84
  Top Layer (.GTL) w10: R17A.2@157,3364 214.62,3306.38 255,3306.38 ; TP2A.1@299.29,3139.76 299.29,3173.23 255,3217.52 255,3306.38 ; 300.7,3352.09 255,3306.38 ; 302.4,3350.39 Q2A.3@395.75,3350.4 395.75,3286.42 407.56,3274.61 v1(431.18,3274.61) ; C4K.1@437.32,947.4 C2K.1@516.06,947.4 556.21,947.4 585.57,918.04 585.57,849.57 559,823 559,764 582.76,740.24 U2K.5@651.89,740.24 793.24,740.24 876.34,823.34 L2K.1@876.34,893.98 ; C4F.1@437.32,1518.27 C2F.1@516.06,1518.27 556.21,1518.27 585.57,1488.9 585.57,1420.44 559,1393.87 559,1334.87 582.76,1311.1 U2F.5@651.89,1311.1 793.24,1311.1 876.34,1394.2 ; U1K.3@644.02,1038.66 644.02,977.72 645.25,978.95 734.24,978.95 754.25,958.94 823.15,958.94 876.34,905.75 L2K.1@876.34,893.98 ; U1F.3@644.02,1609.53 644.02,1548.58 645.25,1549.82 734.24,1549.82 754.25,1529.8 823.15,1529.8 876.34,1476.61 876.34,1394.2 ; v1(875,1160) v1@876.34,1161.34 ; L2F.1@876.34,1464.84 876.34,1394.2 ; C4L.1@1323.15,947.4 C2L.1@1401.89,947.4 1442.03,947.4 1471.4,918.04 1471.4,849.57 1444.83,823 1444.83,764 1468.59,740.24 U2L.5@1537.72,740.24 1679.06,740.24 1762.16,823.34 L2L.1@1762.16,893.98 ; C4G.1@1323.15,1518.27 C2G.1@1401.89,1518.27 1442.03,1518.27 1471.4,1488.9 1471.4,1420.44 1444.83,1393.87 1444.83,1334.87 1468.59,1311.1 U2G.5@1537.72,1311.1 1679.06,1311.1 1762.16,1394.2 ; U1L.3@1529.84,1038.66 1529.84,977.72 1531.08,978.95 1620.06,978.95 1640.08,958.94 1708.98,958.94 1762.16,905.75 L2L.1@1762.16,893.98 ; U1G.3@1529.84,1609.53 1529.84,1548.58 1531.08,1549.82 1620.06,1549.82 1640.08,1529.8 1708.98,1529.8 1762.16,1476.61 1762.16,1394.2 ; L2G.1@1762.16,1464.84 1762.16,1394.2 ; v1(1763,1164) v1@1762.16,1164.84 ; C4M.1@2208.98,947.4 C2M.1@2287.72,947.4 2327.86,947.4 2357.22,918.04 2357.22,849.57 2330.65,823 2330.65,764 2354.42,740.24 U2M.5@2423.54,740.24 2564.89,740.24 2647.99,823.34 L2M.1@2647.99,893.98 ; C4H.1@2208.98,1518.27 C2H.1@2287.72,1518.27 2327.86,1518.27 2357.22,1488.9 2357.22,1420.44 2330.65,1393.87 2330.65,1334.87 2354.42,1311.1 U2H.5@2423.54,1311.1 2564.89,1311.1 2647.99,1394.2 ; U1M.3@2415.67,1038.66 2415.67,977.72 2416.91,978.95 2505.89,978.95 2525.91,958.94 2594.8,958.94 2647.99,905.75 L2M.1@2647.99,893.98 ; U1H.3@2415.67,1609.53 2415.67,1548.58 2416.91,1549.82 2505.89,1549.82 2525.91,1529.8 2594.8,1529.8 2647.99,1476.61 2647.99,1394.2 ; L2H.1@2647.99,1464.84 2647.99,1394.2 ; v1(2649.14,1189.14) 2648.79,1189.49 v1@2647.99,1189.49 ; C4N.1@3094.8,947.4 C2N.1@3173.54,947.4 3213.69,947.4 3243.05,918.04 3243.05,849.57 3216.48,823 3216.48,764 3240.24,740.24 U2N.5@3309.37,740.24 3450.72,740.24 3533.82,823.34 L2N.1@3533.82,893.98 3533.82,905.75 3480.63,958.94 3411.73,958.94 3391.72,978.95 3302.73,978.95 3301.5,977.72 U1N.3@3301.5,1038.66 ; C4I.1@3094.8,1518.27 C2I.1@3173.54,1518.27 3213.69,1518.27 3243.05,1488.9 3243.05,1420.44 3216.48,1393.87 3216.48,1334.87 3240.24,1311.1 U2I.5@3309.37,1311.1 3450.72,1311.1 ; U1I.3@3301.5,1609.53 3301.5,1548.58 3302.73,1549.82 3391.72,1549.82 3411.73,1529.8 3480.63,1529.8 3533.82,1476.61 3533.82,1464.84 3533.82,1394.2 3450.72,1311.1 ; L2N.1@3545,905.16 v1(3545,1226) 3533.82,1237.18 3524.64,1237.18 3450.72,1311.1 ; C4J.1@3980.63,1518.27 C2J.1@4059.37,1518.27 4099.52,1518.27 4128.88,1488.9 4128.88,1420.44 4102.31,1393.87 4102.31,1334.87 4126.07,1311.1 U2J.5@4195.2,1311.1 4336.54,1311.1 4419.65,1394.2 4419.65,1476.61 4366.46,1529.8 4297.56,1529.8 4277.54,1549.82 4188.56,1549.82 4187.32,1548.58 U1J.3@4187.32,1609.53 ; L2K.1@876.34,893.98 v1@876.34,1161.34 ; v1@876.34,1161.34 876.34,1394.2 ; L2L.1@1762.16,893.98 v1@1762.16,1164.84 ; v1@1762.16,1164.84 1762.16,1394.2 ; L2M.1@2647.99,893.98 v1@2647.99,1189.49 ; v1@2647.99,1189.49 2647.99,1394.2
  MidLayer2 (*.G2) w5: v1(64,1160) v1(875,1160) 890.73,1160 ; 890.73,1160.27 890.73,1163.49 v1@1762.49,1163.49 ; v1(1763,1164) 1778.5,1179.5 2639.5,1179.5 2670.5,1210.5 3529.5,1210.5 v1(3545,1226) 3763,1226 3773,1216 4189,1216 4199,1226 4417,1226 v1(4419.65,1223.35)
  MidLayer2 (*.G2) w10: v1@64.2,3283.8 421.99,3283.8 v1(431.18,3274.61)
  MidLayer3 (*.G3) w5: v1@63,1161 v1(63,3285)
  Bottom Layer (.GBL) w10: v1@431.3,3274.49 C14A.2@431.3,3228.35 445.94,3228.35 495.16,3179.13 R9A.1@663.46,3179.13
VREFLO2: C2E.1 C4E.1 C14B.2 L2E.1 Q2B.3 R9B.1 R17B.2 TP2B.1 U1E.3 U2E.5 | length 6016.9
  Top Layer (.GTL) w5: R17B.2@927,3345 973.57,3298.43 1042.4,3298.43 ; U1E.3@4178,2209.4 v1(4178,2331)
  Top Layer (.GTL) w10: TP2B.1@1086.69,3139.76 1086.69,3173.23 1042.4,3217.52 1042.4,3298.43 1042.4,3306.38 1088.11,3352.09 ; 1089.8,3350.39 Q2B.3@1183.15,3350.4 1183.15,3286.42 1194.96,3274.61 v1(1218.58,3274.61) ; C4E.1@3980.63,2108.82 C2E.1@4059.37,2108.82 4099.52,2108.82 4128.88,2079.46 4128.88,2010.99 4102.31,1984.42 4102.31,1925.42 4126.07,1901.65 U2E.5@4195.19,1901.66 4336.54,1901.65 4419.65,1984.76 L2E.1@4419.65,2055.39 4419.65,2067.16 4366.46,2120.35 4297.56,2120.35 4277.54,2140.37 4188.56,2140.37 4187.32,2139.13 U1E.3@4187.32,2200.08
  MidLayer2 (*.G2) w5: v1(1219,2330) 4176,2330 4177,2331 v1(4178,2331)
  MidLayer3 (*.G3) w5: v1(1218.58,3274.61) 1197.6,3253.62 1198.72,2350.23 v1(1219,2330)
  Bottom Layer (.GBL) w10: v1@1218.7,3274.49 C14B.2@1218.7,3228.35 1233.35,3228.35 1282.56,3179.13 R9B.1@1450.87,3179.13
VREFLO3: C2O.1 C4O.1 C14C.2 L2O.1 Q2C.3 R9C.1 R17C.2 TP2C.1 U1O.3 U2O.5 | length 6353.6
  Top Layer (.GTL) w5: U1O.3@4183.73,1042.25 v1(4183.73,1137.49)
  Top Layer (.GTL) w10: R17C.2@1714.4,3345 1777.4,3282 1829.8,3282 ; TP2C.1@1874.09,3139.76 1874.09,3173.23 1829.8,3217.52 1829.8,3282 ; v1(2005.98,3274.61) 1982.36,3274.61 1970.55,3286.42 Q2C.3@1970.55,3350.4 1873.82,3350.39 1829.8,3306.38 1829.8,3282 ; C4O.1@3980.63,947.4 C2O.1@4059.37,947.4 4099.52,947.4 4128.88,918.04 4128.88,849.57 4102.31,823 4102.31,764 4126.07,740.24 4336.54,740.24 4419.65,823.34 4419.65,905.75 4366.46,958.94 4297.56,958.94 4277.54,978.95 4188.56,978.95 4187.32,977.72 U1O.3@4187.32,1038.66
  MidLayer2 (*.G2) w5: v1(2092,1151) 2152,1151 2160.5,1142.5 2303.66,1142.5 2308.16,1147 4171,1147 v1@4183.73,1134.27 ; v1(4183.73,1137.49) v1@4183.73,1134.27 ; v1@4184,1134 v1@4183.73,1134.27
  MidLayer3 (*.G3) w5: v1(2005.98,3274.61) 2005.23,3273.85 2005.23,2997.23 2059.84,2942.63 2059.84,2145.19 2104.45,2100.58 2104.45,1457.18 2092,1444.73 v1(2092,1151)
  Bottom Layer (.GBL) w10: v1(2005.98,3274.61) 2006.1,3274.49 C14C.2@2006.1,3228.35 2020.75,3228.35 2069.96,3179.13 R9C.1@2238.27,3179.13
VREFLO4: C2A.1 C2B.1 C2C.1 C2D.1 C4A.1 C4B.1 C4C.1 C4D.1 C14D.2 L2A.1 L2B.1 L2C.1 L2D.1 Q2D.3 R9D.1 R17D.2 TP2D.1 U1A.3 U1B.3 U1C.3 U1D.3 U2A.5 U2B.5 U2C.5 U2D.5 | length 9083.7
  Top Layer (.GTL) w5: U1A.3@644.01,2200.08 686.94,2243 1491.58,2243 1529.84,2204.74 1567.11,2242 2373.75,2242 U1C.3@2415.67,2200.08 2460.59,2245 v1(2787,2245) 3287,2245 3301.5,2230.5 U1D.3@3301.5,2200.08
  Top Layer (.GTL) w10: C4A.1@437.32,2108.82 C2A.1@516.06,2108.82 556.21,2108.82 585.57,2079.46 585.57,2010.99 559,1984.42 559,1925.42 582.76,1901.65 U2A.5@651.89,1901.65 793.24,1901.65 876.34,1984.76 L2A.1@876.34,2055.39 876.34,2067.16 823.15,2120.35 754.25,2120.35 734.24,2140.37 645.25,2140.37 644.02,2139.13 U1A.3@644.01,2200.08 ; C4B.1@1323.15,2108.82 C2B.1@1401.89,2108.82 1442.03,2108.82 1471.4,2079.46 1471.4,2010.99 1444.83,1984.42 1444.83,1925.42 1468.59,1901.65 U2B.5@1537.72,1901.66 1679.06,1901.65 1762.16,1984.76 L2B.1@1762.16,2055.39 1762.16,2067.16 1708.98,2120.35 1640.08,2120.35 1620.06,2140.37 1531.08,2140.37 1529.84,2139.13 U1B.3@1529.84,2200.08 ; C4C.1@2208.98,2108.82 C2C.1@2287.72,2108.82 2327.86,2108.82 2357.22,2079.46 2357.22,2010.99 2330.65,1984.42 2330.65,1925.42 2354.42,1901.65 U2C.5@2423.54,1901.65 2564.89,1901.65 2647.99,1984.76 L2C.1@2647.99,2055.39 2647.99,2067.16 2594.8,2120.35 2525.91,2120.35 2505.89,2140.37 2416.91,2140.37 2415.67,2139.13 U1C.3@2415.67,2200.08 ; R17D.2@2501.8,3345 2569.8,3277 2617.21,3277 ; TP2D.1@2661.5,3139.76 2661.5,3173.23 2617.21,3217.52 2617.21,3277 ; v1(2793.39,3274.61) 2769.76,3274.61 2757.95,3286.42 Q2D.3@2757.95,3350.4 2664.6,3350.39 2662.91,3352.09 2617.21,3306.38 2617.21,3277 ; C4D.1@3094.8,2108.82 C2D.1@3173.54,2108.82 3213.69,2108.82 3243.05,2079.46 3243.05,2010.99 3216.48,1984.42 3216.48,1925.42 3240.24,1901.65 U2D.5@3309.37,1901.65 3450.72,1901.65 3533.82,1984.76 L2D.1@3533.82,2055.39 3533.82,2067.16 3480.63,2120.35 3411.73,2120.35 3391.72,2140.37 3302.73,2140.37 3301.5,2139.13 U1D.3@3301.5,2200.08
  MidLayer3 (*.G3) w5: v1(2787,2245) 2787,2653.22 2779.57,2660.64 2779.57,2946.57 2792.63,2959.63 2792.63,3273.85 v1(2793.39,3274.61)
  Bottom Layer (.GBL) w10: v1(2793.39,3274.61) 2793.5,3274.49 C14D.2@2793.5,3228.35 2808.15,3228.35 2857.36,3179.13 R9D.1@3025.67,3179.13
VREFLO5: C6A.1 C6B.1 C14E.2 C37A.1 C37B.1 L4A.1 L4B.1 Q2E.3 R9E.1 R17E.2 TP2E.1 U4A.3 U4B.3 U5A.5 U5B.5 U7A.5 U7B.5 | length 7271.9
  Top Layer (.GTL) w5: U4A.3@617.4,2799.57 621,2803.17 v1(621,2961) ; U4B.3@1690.24,2799.57 U4B.3@1693.83,2803.17 ; U4B.3@1691,2800.33 v1(1691,2963)
  Top Layer (.GTL) w10: L4A.1@292.4,2653.31 331.4,2653.31 383.4,2705.31 494.4,2705.31 C6A.1@497.4,2708.31 ; U4A.3@617.4,2799.57 588.66,2799.57 C6A.1@497.4,2708.31 ; v1(932,2655) 905.71,2655 902.4,2658.31 777.4,2658.31 C37A.1@727.4,2708.31 654.9,2635.81 616.4,2674.31 531.4,2674.31 C6A.1@497.4,2708.31 ; U7A.5@1023.86,2478.31 1025.16,2477 v1(1118,2477) ; L4B.1@1365.24,2653.31 1404.24,2653.31 1456.24,2705.31 1567.24,2705.31 C6B.1@1570.24,2708.31 ; U4B.3@1690.24,2799.57 1661.5,2799.57 C6B.1@1570.24,2708.31 ; v1(2004.83,2655) 1978.54,2655 1975.24,2658.31 1850.24,2658.31 C37B.1@1800.24,2708.31 1727.74,2635.81 1689.24,2674.31 1604.24,2674.31 C6B.1@1570.24,2708.31 ; U7B.5@2096.69,2478.31 2098,2477 v1(2190.83,2477) ; R17E.2@3289.21,3345 3346.2,3288 3404.61,3288 ; TP2E.1@3448.9,3139.76 3448.9,3173.23 3404.61,3217.52 3404.61,3288 ; 3450.31,3352.09 3404.61,3306.38 3404.61,3288 ; 3452,3350.39 Q2E.3@3545.35,3350.4 3545.35,3286.42 3557.16,3274.61 v1(3580.79,3274.61)
  MidLayer2 (*.G2) w5: v1(621,2961) 623,2963 v1(1691,2963) 2204.84,2963 2205.34,2962.5 2256.5,2962.5 2296,3002 3118,3002 3151,2969 3258.84,2969 3269.34,2958.5 3564.74,2958.5 v1(3579.73,2973.49)
  MidLayer3 (*.G3) w5: v1@3580,2974 3579.73,2973.73 v1(3579.73,2973.49) 3580.03,2973.79 3580.03,3273.85 v1(3580.79,3274.61)
  Bottom Layer (.GBL) w10: v1(932,2655) 1114,2655 1140,2629 1140,2499 v1(1118,2477) ; v1(2004.83,2655) 2186.83,2655 2212.83,2629 2212.83,2499 v1(2190.83,2477) ; v1@3580.9,3274.49 C14E.2@3580.91,3228.35 3595.55,3228.35 3644.76,3179.13 R9E.1@3813.07,3179.13
VREFLO6: C6C.1 C6D.1 C14F.2 C37C.1 C37D.1 L4C.1 L4D.1 Q2F.3 R9F.1 R17F.2 TP2F.1 U4C.3 U4D.3 U5C.5 U5D.5 U7C.5 U7D.5 | length 5933.4
  Top Layer (.GTL) w5: v1(2749,2966) 2763.07,2951.93 U4C.3@2763.07,2799.57 U4C.3@2766.67,2803.17 ; U4D.3@3835.9,2799.57 U4D.3@3839.5,2803.17 ; U4D.3@3836,2799.66 v1(3836,2954)
  Top Layer (.GTL) w10: L4C.1@2438.07,2653.31 2477.07,2653.31 2529.07,2705.31 2640.07,2705.31 C6C.1@2643.07,2708.31 ; U4C.3@2763.07,2799.57 2734.33,2799.57 C6C.1@2643.07,2708.31 ; v1(3077.67,2655) 3051.38,2655 3048.07,2658.31 2923.07,2658.31 C37C.1@2873.07,2708.31 2800.57,2635.81 2762.07,2674.31 2677.07,2674.31 C6C.1@2643.07,2708.31 ; U7C.5@3169.53,2478.31 3170.83,2477 v1(3263.67,2477) ; L4D.1@3510.91,2653.31 3549.91,2653.31 3601.91,2705.31 3712.91,2705.31 C6D.1@3715.91,2708.31 ; U4D.3@3835.9,2799.57 3807.17,2799.57 C6D.1@3715.91,2708.31 ; R17F.2@4076.61,3345 4115.22,3306.38 4192.01,3306.38 ; v1(4150.5,2655) 4124.21,2655 4120.91,2658.31 3995.91,2658.31 C37D.1@3945.91,2708.31 3873.41,2635.81 3834.91,2674.31 3749.91,2674.31 C6D.1@3715.91,2708.31 ; TP2F.1@4236.3,3139.76 4236.3,3173.23 4192.01,3217.52 4192.01,3306.38 ; U7D.5@4242.36,2478.31 4243.67,2477 v1(4336.5,2477) ; v1(4368.19,3274.61) 4344.57,3274.61 4332.76,3286.42 Q2F.3@4332.75,3350.39 4239.41,3350.39 4237.71,3352.09 4192.01,3306.38
  MidLayer2 (*.G2) w5: v1(2749,2966) 2767,2984 3110.54,2984 3154.04,2940.5 3822.5,2940.5 v1(3836,2954) 3851,2969 v1(4366,2969)
  MidLayer3 (*.G3) w5: v1@4366,2970 v1(4366,2969) 4369,2972 4369,3082.15 4367.44,3083.72 4367.44,3273.85 v1(4368.19,3274.61)
  Bottom Layer (.GBL) w10: v1(3077.67,2655) 3259.67,2655 3285.67,2629 3285.67,2499 v1(3263.67,2477) ; v1(4150.5,2655) 4332.5,2655 4358.5,2629 4358.5,2499 v1(4336.5,2477) ; v1@4368.31,3274.49 C14F.2@4368.31,3228.35 4382.95,3228.35 4432.16,3179.13 R9F.1@4600.47,3179.13